# Altium PCB print_circute_boost_converter.PcbDoc
Units mm, origin at the board's own origin, x right, y up, seen from the top; angles counter-clockwise.
Board outline 70.74 x 29.08 mm, 3 copper layers (Top Layer, Signal Layer 1, Bottom Layer), stack 0.488 mm thick; 12 components, 9 nets, 36 pads, 0 vias.
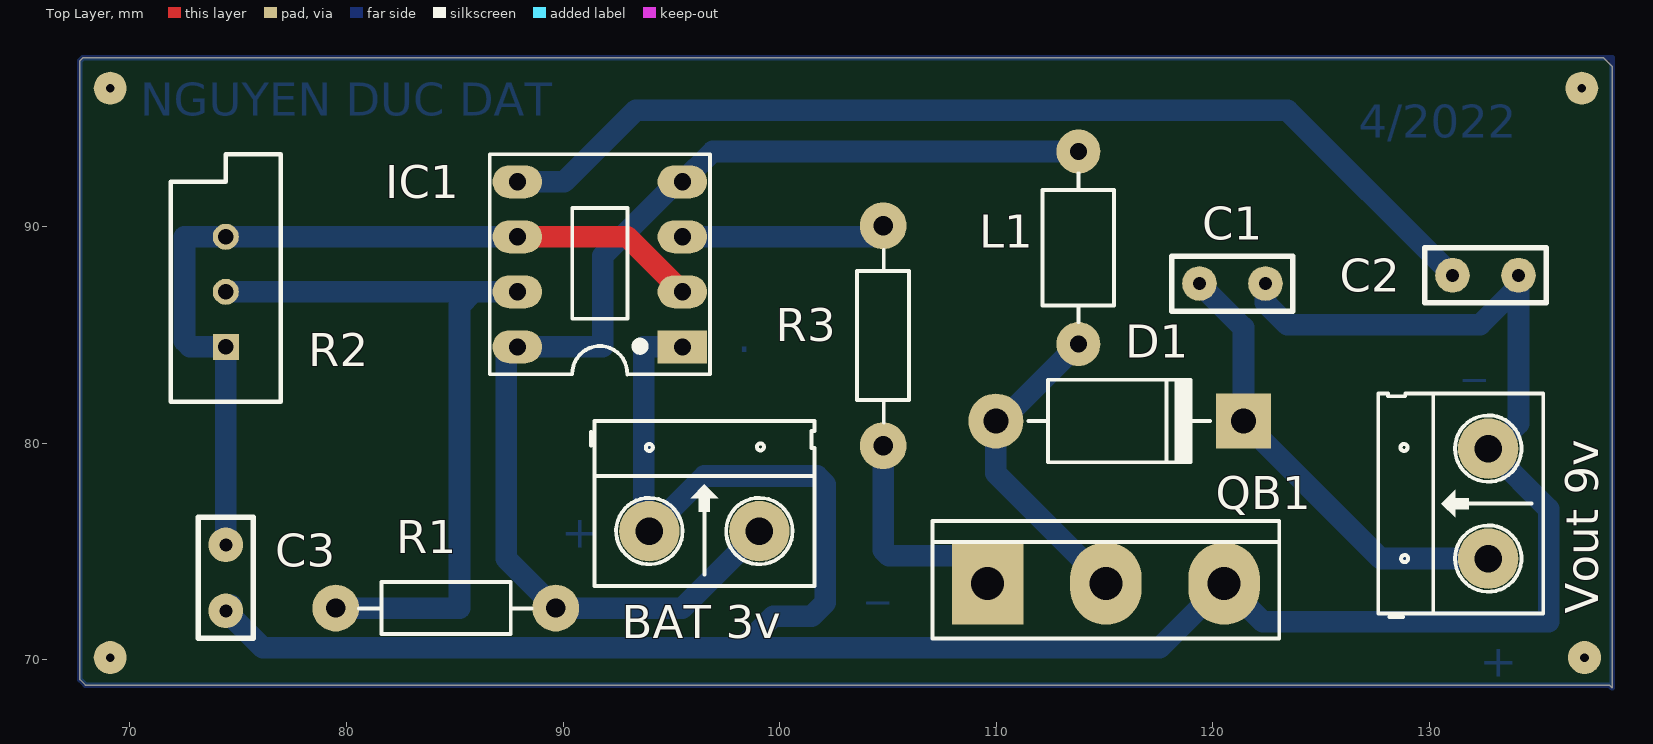
[diagram p0: Top Layer view]
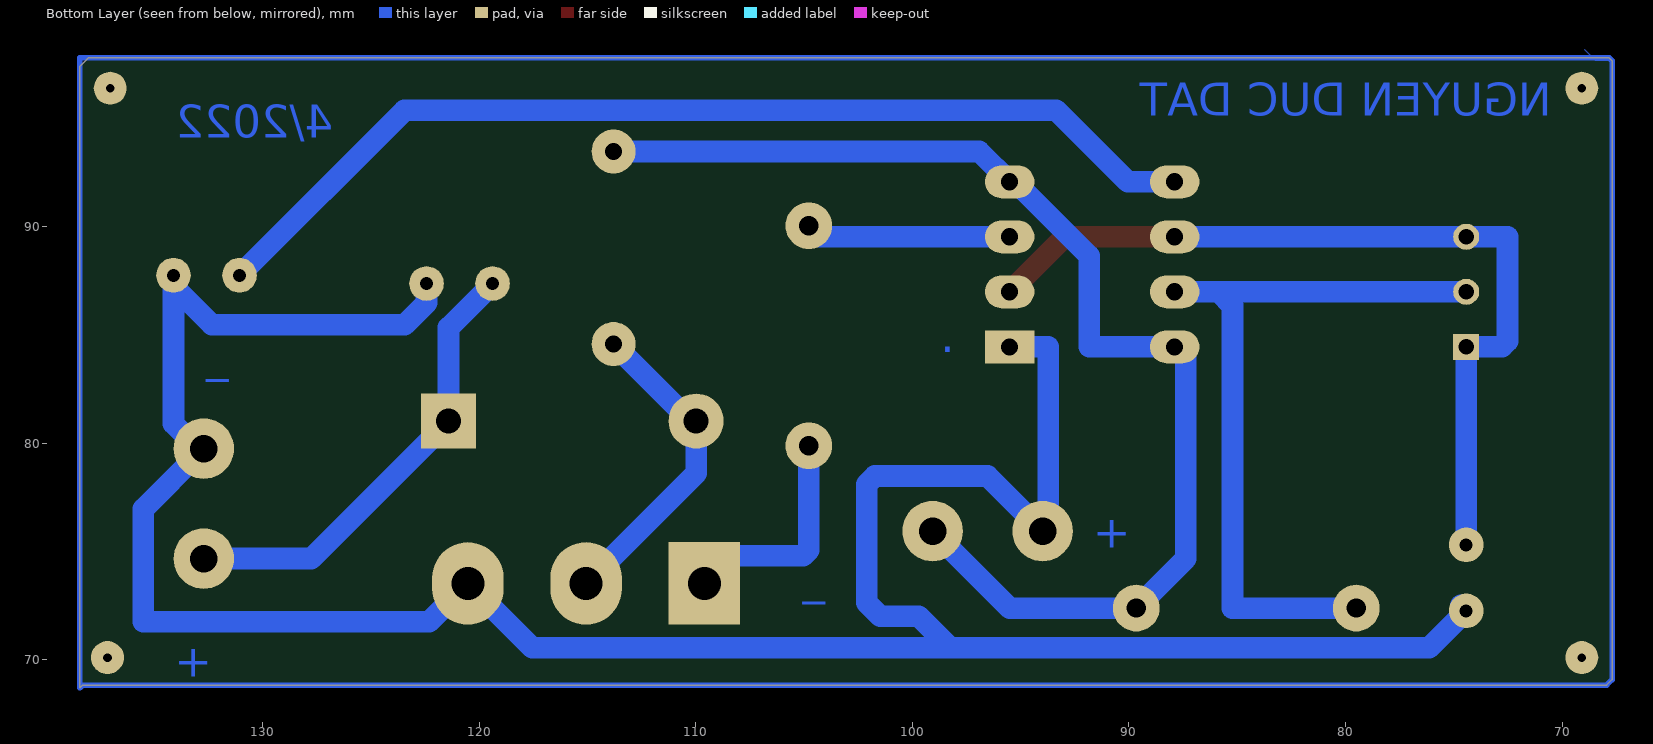
[diagram p1: Bottom Layer view, seen from below]
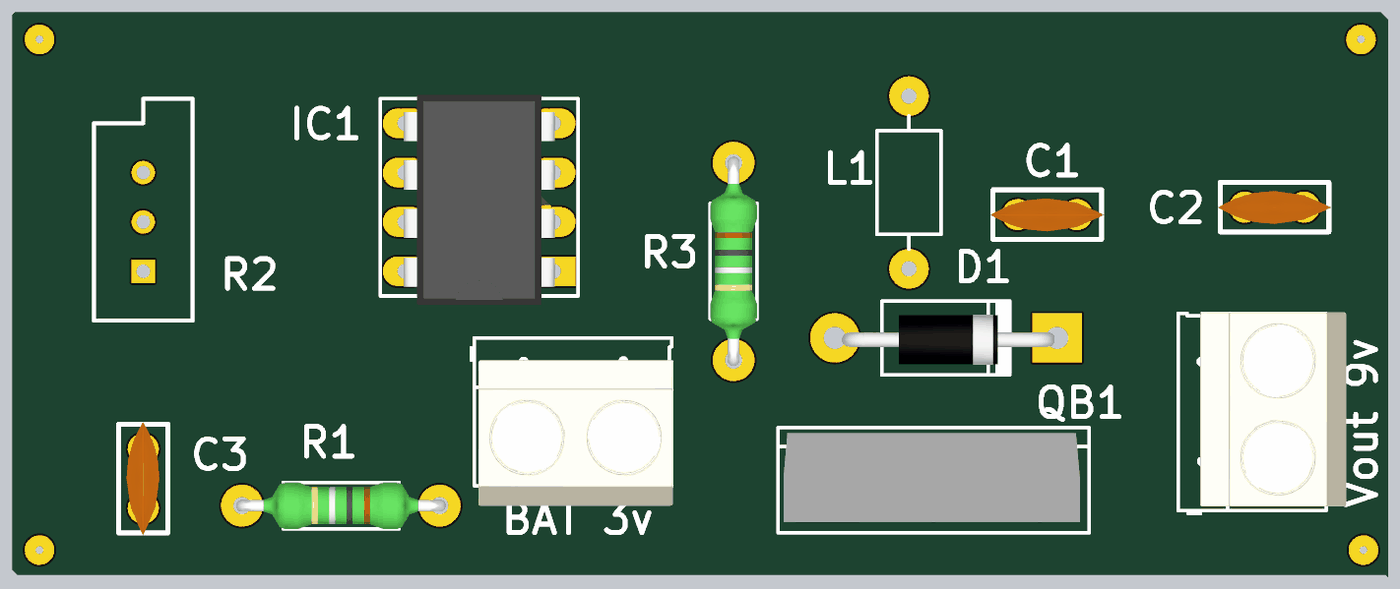
[diagram p2: 3D render of the assembled board from above, using the file's embedded part models]

## Layer stack, top to bottom
Top Solder: solder mask 0.0102, Solder Resist, Dk 3.5
Top Layer: signal copper 0.0356
Dielectric 1: core 0.254, FR-4, Dk 4.2
Signal Layer 1: signal copper 0.036
Dielectric 2: prepreg 0.127, Dk 4.2
Bottom Layer: signal copper 0.0356
Bottom Solder: solder mask 0.0102, Solder Resist, Dk 3.5

## Board outline
67.945,68.834 67.691,69.088 67.691,97.663 67.818,97.79 138.049,97.79 138.43,97.409 138.43,68.707 138.303,68.834

## Design rules (kind name [scope] priority, off if disabled: settings)
Clearance [All] p1: gap=0.254
PolygonConnect [All] p1: connectstyle=Relief reliefconductorwidth=0.254 reliefentries=2 polygonreliefangle="90 Angle" airgapwidth=0.254
RoutingVias [All] p1: holewidth=0.711 width=1.27 viastyle="Through Hole" minholewidth=0.711 minwidth=1.27 maxholewidth=0.711 maxwidth=1.27
SolderMaskExpansion [All] p1: expansion=0.102
Width [All] p1: maxlimit=3 minlimit=0.5 preferedwidth=1
30 further rules are at their usual default settings.

## Components (designator, comment, footprint, x,y, rotation, side; value= is the part's Value field where it differs from the comment)
"BAT 3v" "Header 2_1" HED2 93.98,75.946 r0 top (schematic designator BAT1)
C1 "Cap Non-pol" "Cap Non-Pol 3mm" 120.904,87.376 r180 top
C2 "Cap Non-pol" "Cap Non-Pol 3mm" 132.588,87.757 r180 top
C3 "Cap Non-pol" "Cap Non-Pol 3mm" 74.422,73.787 r90 top
D1 "1N4007" D2A 121.412,81.026 r180 top
IC1 "LM555" DIP8 91.694,88.138 r90 top
L1 "80mH" L/0.4 113.792,84.582 r90 top
QB1 "D718" QTO-247 109.601,73.533 r0 top
R1 "1k" RES-1/4W 84.963,72.263 r0 top
R2 "RPot" VR5 74.422,86.995 r90 top
R3 "330" RES-1/4W 104.902,85.344 r90 top
"Vout 9v" "Header 2_1" HED2 132.715,74.676 r90 top (schematic designator Vout1)

## Footprints (in the part's own frame and the unit in brackets; to place one, negate y for a bottom-side part, rotate by r counter-clockwise, add the part's x,y. Pads: shape width x height; smd on the part's side, far side on the other; paste and mask are expansions set on the pad)
"Cap Non-Pol 3mm" [mm] "Capacitor, Radial; Body 5.6 x 2.5 mm (L x W typ); Pin Spacing 3 mm (typ); Solder Pad 35mil"
  round 1.6 hole 0.6: 1(-1.524,0) 2(1.524,0)
  silkscreen extent -2.79,-1.27 2.79,1.27, body extent -2.92,-0.83 2.92,0.86, height 6.22
D2A [mil] "Diode 2A, W 150mil, L 450mil"
  round 100 hole 45: 1(450,0)
  rect 100x100 hole 45: 2(0,0)
  silkscreen extent 61,-75 391,75, body extent 5,-47 435,54, height 100
DIP8 [mil] "DIP, 8-Leads, Row Spacing 7.62mm, Pitch 2.54mm, Body 9.91x6.73mm"
  rect 60x90 hole 31: 1(-145,-150)
  oval 60x90 hole 31: 2(-45,-150) 3(55,-150) 4(155,-150) 5(155,150) 6(55,150) 7(-45,150) 8(-145,150)
  silkscreen extent -195,-200 205,200, body extent -213,-153 213,153, height 177
HED2 [mil] "Header 2, 2 pin, hight 300mil, Pin to Pin 200, Colour Green"
  round 110 hole 50: 1(0,0) 2(200,0)
  silkscreen extent -106,-100 300,200, body extent -92,-140 302,155, height 394
L/0.4 [mil] "Inductor , 2 Pin, L 350mil, W 150 mil"
  round 80 hole 31: 1(0,0) 2(350,0)
  silkscreen extent 40,-65 310,65
QTO-247 [mil] "TO-247"
  rect 130x150 hole 60: 1(0,0)
  oval 130x150 hole 60: 2(215,0) 3(430,0)
  silkscreen extent -100,-100 530,113, body extent -89,-78 511,102, height 941
RES-1/4W [mil]
  round 85 hole 35: 1(-215,5) 2(185,5)
  silkscreen extent -173,-42 141,52, body extent -227,-42 197,52, height 95
VR5 [mm] "Thru-Hole; 3 Leads"
  rect 1.2x1.2 hole 0.7: 1(-2.54,0)
  round 1.2 hole 0.7: 2(0,0) 3(2.54,0)
  silkscreen extent -5.08,-2.54 6.35,2.54

## Part data
"BAT 3v" "Vout 9v": "Header, 2-Pin"
C1 C2 C3: "Non-polarized Capacitor"
D1: library part D1A, "Diode 1A"
IC1: "Timer"
L1: library part L1, "Inductor"
QB1: library part D718_1, "Transistor Power Supply"
R1 R3: library part Res, "Res"
R2: "Potentiometer"

## Free pads (board coordinates)
  round 1.524 hole 0.4: 3(69.088,70.104) 3(69.088,96.393) 3(137.033,96.393) 3(137.16,70.104)

## Nets (pads, with @x,y where several pads share a name; then routed paths per layer and width w, separated by ;. In a path a pad name is that pad's centre, name@x,y a point inside that pad or via, vN(x,y) a via of type N, cw(c..) or ccw(c..) an arc to the next point about the centre after c; other vN are vias at no path point)
GND: "BAT 3v.1" "Vout 9v.2" C1.1 C2.1 C3.1 IC1.1 QB1.3 | length 125.6
  Bottom Layer w1: C3.1@74.676,72.517 C3.1 76.129,70.556 98.242,70.556 ; IC1.1 93.726,84.455 93.726,76.2 93.98,75.946 96.52,78.486 101.727,78.486 102.108,78.105 102.108,72.644 101.473,72.009 99.695,72.009 98.242,70.556 ; C1.1 122.428,86.487 123.444,85.471 132.334,85.471 C2.1@134.112,87.249 ; 132.715,79.756 132.842,79.629 ; C2.1 C2.1@134.112,87.249 ; 98.242,70.556 117.546,70.556 QB1.3 122.301,71.755 135.509,71.755 135.509,76.962 132.842,79.629 ; 132.842,79.629 134.112,80.899 C2.1@134.112,87.249
NetBAT1_2: "BAT 3v.2" IC1.4 IC1.8 L1.2 R1.2 | length 56.3
  Bottom Layer w1: 99.06,75.946 95.504,72.39 R1.2 87.376,74.676 87.376,83.947 IC1.8 91.821,84.455 91.821,88.646 95.377,92.202 IC1.4 96.901,93.472 L1.2
NetC1_2: "Vout 9v.1" C1.2 D1.2 | length 21.1
  Bottom Layer w1: C1.2 121.412,85.344 D1.2 127.762,74.676 132.715,74.676
NetC2_2: C2.2 IC1.5 | length 47.7
  Bottom Layer w1: IC1.5 90.043,92.075 93.345,95.377 123.444,95.377 C2.2
NetC3_2: C3.2 IC1.2 IC1.6 R2.1 R2.3 | length 40.1
  Top Layer w1: IC1.6 92.964,89.535 IC1.2
  Bottom Layer w1: C3.2 R2.1 72.771,84.455 72.517,84.709 72.517,89.535 R2.3 IC1.6 ; IC1.2 IC1.2@95.631,86.995
NetD1_1: D1.1 L1.1 QB1.2 | length 14.9
  Bottom Layer w1: L1.1 110.236,81.026 D1.1 109.982,78.613 QB1.2
NetIC1_3: IC1.3 R3.2 | length 9.5
  Bottom Layer w1: IC1.3 104.267,89.535 R3.2
NetIC1_7: IC1.7 R1.1 R2.2 | length 34
  Bottom Layer w1: R2.2 85.852,86.995 ; R1.1 85.217,72.39 85.217,86.36 85.852,86.995 ; IC1.7 85.852,86.995
NetQB1_1: QB1.1 R3.1 | length 10.3
  Bottom Layer w1: R3.1 104.775,75.057 105.029,74.803 108.331,74.803 QB1.1
copper on no net: | length 199.3
  Bottom Layer w0.254: 67.691,69.088 67.945,68.834 138.303,68.834 138.43,68.707 138.43,97.79 71.501,97.79 67.818,97.79 67.691,97.663 67.691,69.088

## Polygon pours and split planes (outlines as drawn)
no net on Bottom Layer "Bottom Layer-No Net" (solid, pour order 2): 67.691,97.028 67.691,97.663 68.453,97.663 68.961,98.171 68.58,97.79 67.818,97.79

## Other copper
Bottom Layer:
  text "NGUYEN DUC DAT" at 70.485,95.123 h1.52
  text "4/2022" at 126.746,94.107 h1.52
  text "." at 98.044,84.201 h1.52
  text "_" at 131.572,83.312 h1.52
  text "+" at 89.916,75.184 h1.52
  text "_" at 104.013,73.025 h1.52
  text "+" at 132.334,69.215 h1.52